# EAGLE board homeboard3 (EAGLE 6.0)
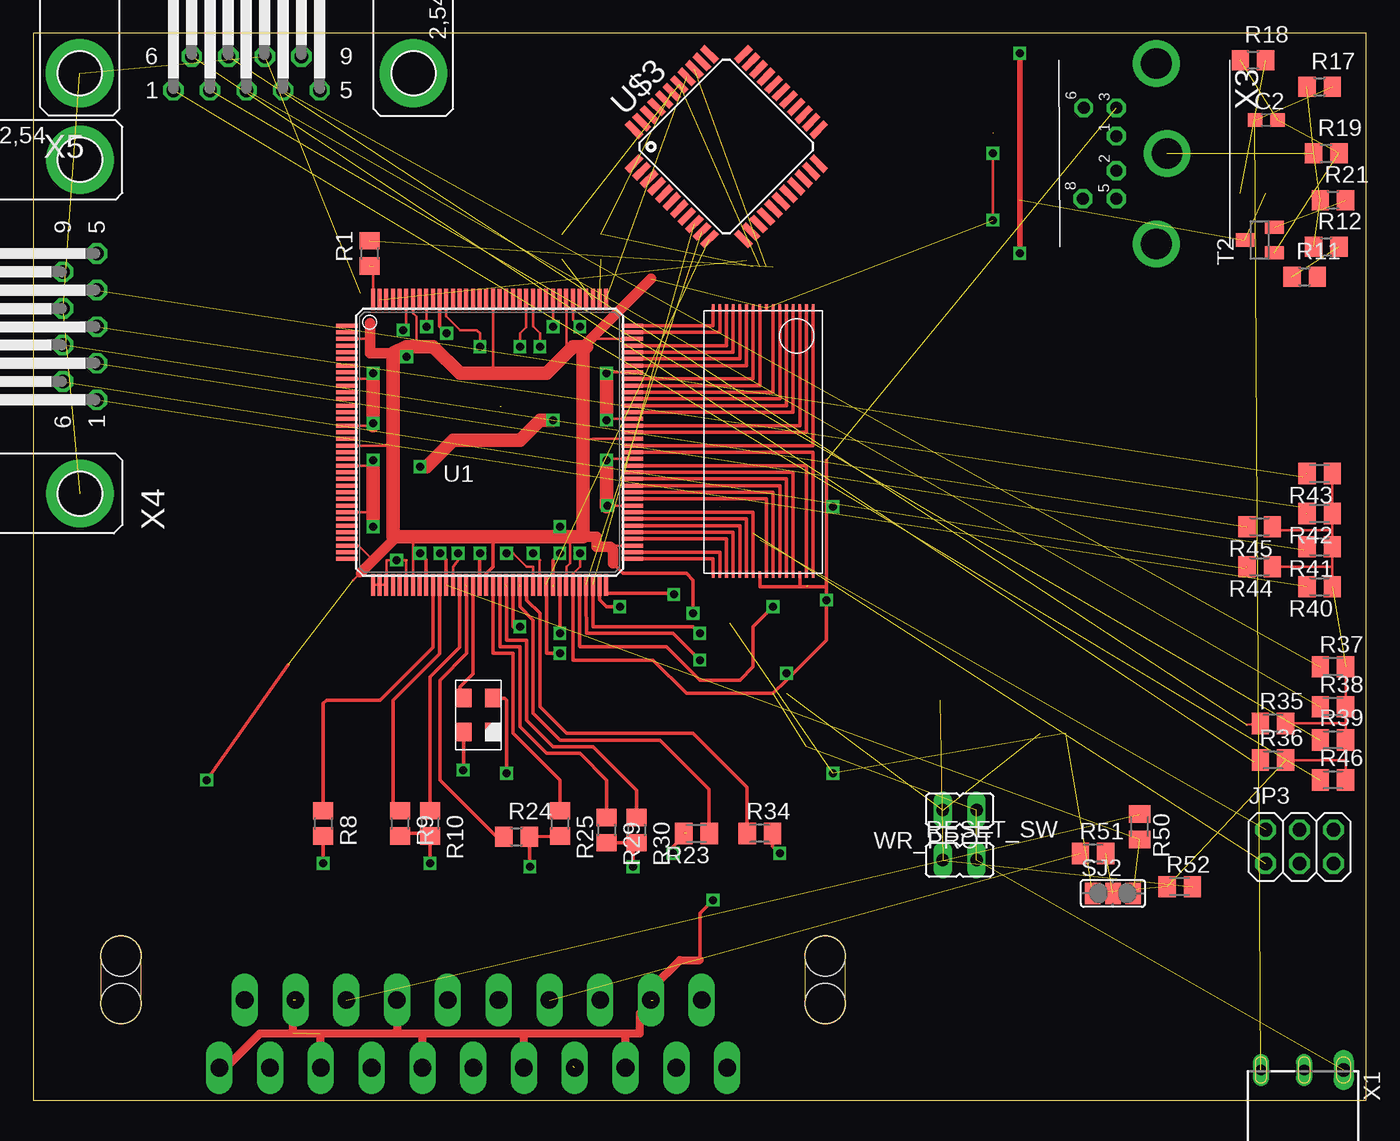
[diagram p0: board, top side]
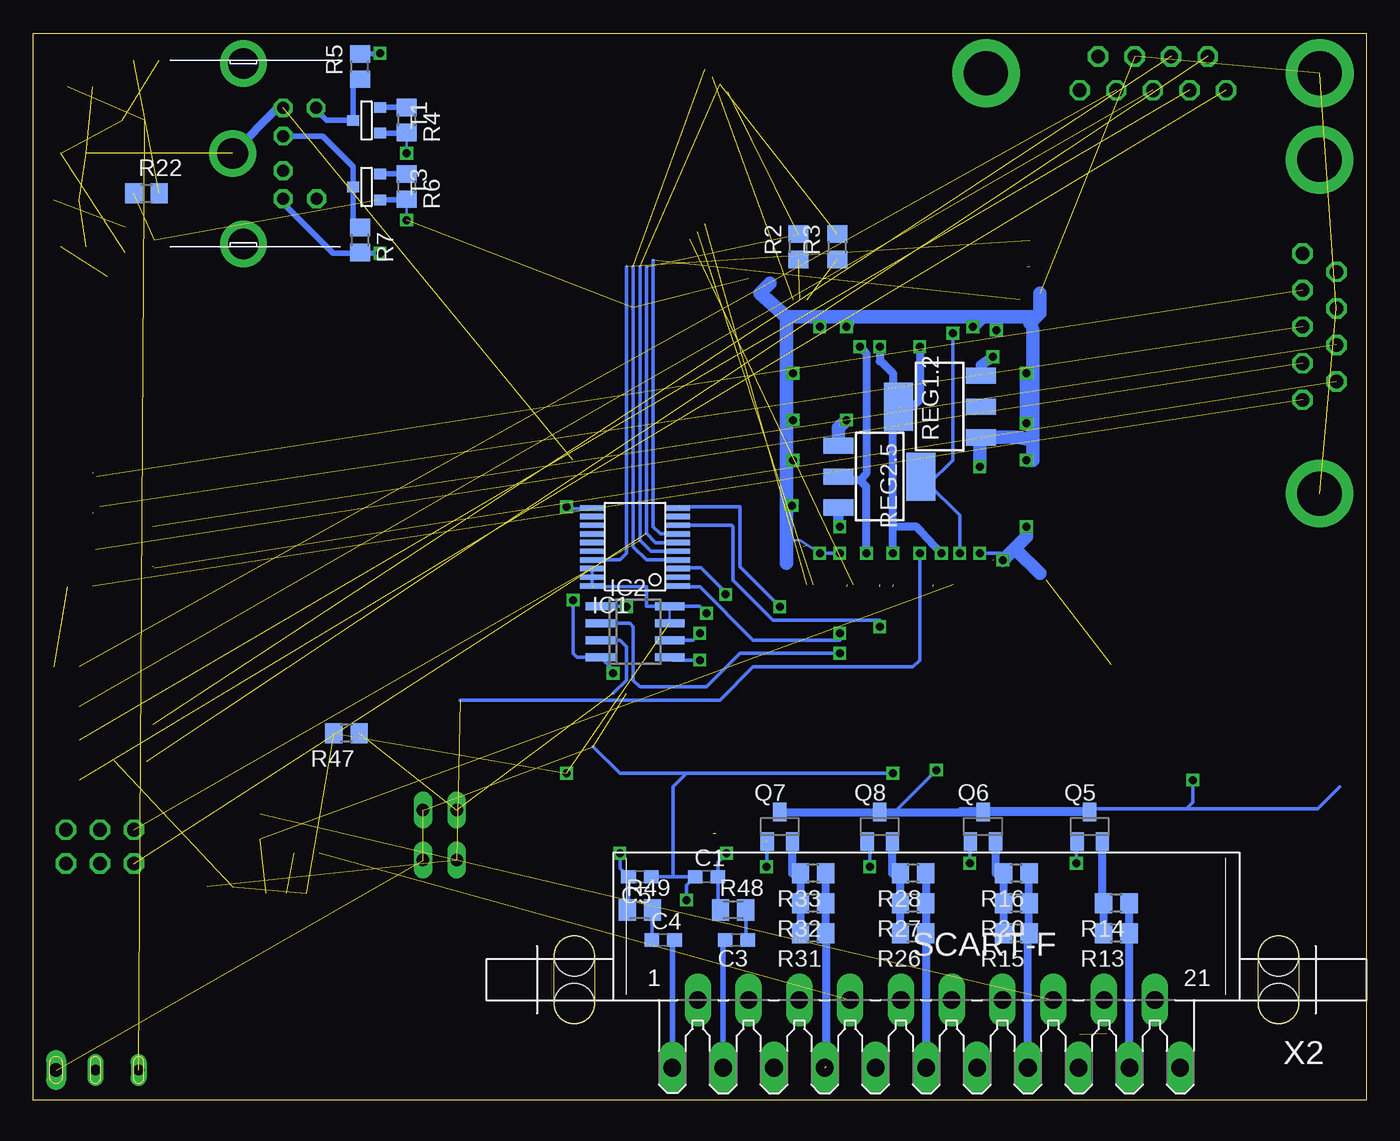
[diagram p1: board, bottom side, seen from below]

Size 100 x 80 mm. Coordinates in mm from the lower left corner, seen from the top.
Outline: 0,0 100,0 100,80 0,80 0,0
Copper layers (1*16): Top 0.0356mm / dielectric 1.5011mm / Bottom 0.0356mm
Design rules: minimum track width 6mil, minimum drill 13mil, track to track 6mil, track to pad 6mil, pad to pad 6mil, via to via 6mil, smd to smd 6mil, copper to edge 15mil, drill to drill 6mil, minimum pad ring 7mil, minimum via ring 7mil, stop-mask expansion 4mil, vias tented up to drill 0mil, thermal gap 10mil
Net classes: 1 power: width 0.6 mm, drill 1.1 mm, clearance 0.4 mm

## Footprints (pad centres in the part's own frame; a part is rotated, then mirrored left to right if it is on the bottom)
C0603 = smd 1.1 x 1: 1 -0.85,0; 2 0.85,0
VO20 = smd 0.4 x 1.8: 1 5.85,6.15; 2 5.2,6.15; 3 4.55,6.15; 4 3.9,6.15; 5 3.25,6.15; 6 2.6,6.15; 7 1.95,6.15; 8 1.3,6.15; 9 0.65,6.15; 10 0,6.15; 11 0,-0.3; 12 0.65,-0.3; 13 1.3,-0.3; 14 1.95,-0.3; 15 2.6,-0.3; 16 3.25,-0.3; 17 3.9,-0.3; 18 4.55,-0.3; 19 5.2,-0.3; 20 5.85,-0.3
SO-08 = smd 0.6 x 2.2: 1 -1.905,-2.6; 2 -0.635,-2.6; 3 0.635,-2.6; 4 1.905,-2.6; 5 1.905,2.6; 6 0.635,2.6; 7 -0.635,2.6; 8 -1.905,2.6
2X03 = drill 1.016 octagon: 1 -2.54,-1.27; 2 -2.54,1.27; 3 0,-1.27; 4 0,1.27; 5 2.54,-1.27; 6 2.54,1.27
SOT23 = smd 1 x 1.4: 1 -0.95,-1.1; 2 0.95,-1.1; 3 0,1.1
R0805 = smd 1.3 x 1.5: 1 -0.95,0; 2 0.95,0
M0805 = smd 1.3 x 1.6: 1 -0.95,0; 2 0.95,0
SOT223 = smd 1.219 x 2.235: 1 -2.311,-3.099; 2 0,-3.099; 3 2.311,-3.099 | smd 3.6 x 2.2: 4 0,3.099
JP1 = drill 0.914 long: 1 0,-1.27; 2 0,1.27
SJ_2 = smd 1.168 x 1.6: 1 -1.524,0; 2 0,0; 3 1.524,0
SOT-23 = smd 0.787 x 0.889: 1 0.025,-1.016; 2 -0.94,1.016; 3 0.991,1.016
TQ144 = smd 1.6 x 0.3: P1 -10.7,8.75; P2 -10.7,8.25; P3 -10.7,7.75; P4 -10.7,7.25; P5 -10.7,6.75; P6 -10.7,6.25; P7 -10.7,5.75; P8 -10.7,5.25; P9 -10.7,4.75; P10 -10.7,4.25; P11 -10.7,3.75; P12 -10.7,3.25; P13 -10.7,2.75; P14 -10.7,2.25; P15 -10.7,1.75; P16 -10.7,1.25; P17 -10.7,0.75; P18 -10.7,0.25; P19 -10.7,-0.25; P20 -10.7,-0.75; P21 -10.7,-1.25; P22 -10.7,-1.75; P23 -10.7,-2.25; P24 -10.7,-2.75; P25 -10.7,-3.25; P26 -10.7,-3.75; P27 -10.7,-4.25; P28 -10.7,-4.75; P29 -10.7,-5.25; P30 -10.7,-5.75; P31 -10.7,-6.25; P32 -10.7,-6.75; P33 -10.7,-7.25; P34 -10.7,-7.75; P35 -10.7,-8.25; P36 -10.7,-8.75; P73 10.7,-8.75; P74 10.7,-8.25; P75 10.7,-7.75; P76 10.7,-7.25; P77 10.7,-6.75; P78 10.7,-6.25; P79 10.7,-5.75; P80 10.7,-5.25; P81 10.7,-4.75; P82 10.7,-4.25; P83 10.7,-3.75; P84 10.7,-3.25; P85 10.7,-2.75; P86 10.7,-2.25; P87 10.7,-1.75; P88 10.7,-1.25; P89 10.7,-0.75; P90 10.7,-0.25; P91 10.7,0.25; P92 10.7,0.75; P93 10.7,1.25; P94 10.7,1.75; P95 10.7,2.25; P96 10.7,2.75; P97 10.7,3.25; P98 10.7,3.75; P99 10.7,4.25; P100 10.7,4.75; P101 10.7,5.25; P102 10.7,5.75; P103 10.7,6.25; P104 10.7,6.75; P105 10.7,7.25; P106 10.7,7.75; P107 10.7,8.25; P108 10.7,8.75 | smd 0.3 x 1.6: P37 -8.75,-10.7; P38 -8.25,-10.7; P39 -7.75,-10.7; P40 -7.25,-10.7; P41 -6.75,-10.7; P42 -6.25,-10.7; P43 -5.75,-10.7; P44 -5.25,-10.7; P45 -4.75,-10.7; P46 -4.25,-10.7; P47 -3.75,-10.7; P48 -3.25,-10.7; P49 -2.75,-10.7; P50 -2.25,-10.7; P51 -1.75,-10.7; P52 -1.25,-10.7; P53 -0.75,-10.7; P54 -0.25,-10.7; P55 0.25,-10.7; P56 0.75,-10.7; P57 1.25,-10.7; P58 1.75,-10.7; P59 2.25,-10.7; P60 2.75,-10.7; P61 3.25,-10.7; P62 3.75,-10.7; P63 4.25,-10.7; P64 4.75,-10.7; P65 5.25,-10.7; P66 5.75,-10.7; P67 6.25,-10.7; P68 6.75,-10.7; P69 7.25,-10.7; P70 7.75,-10.7; P71 8.25,-10.7; P72 8.75,-10.7; P109 8.75,10.7; P110 8.25,10.7; P111 7.75,10.7; P112 7.25,10.7; P113 6.75,10.7; P114 6.25,10.7; P115 5.75,10.7; P116 5.25,10.7; P117 4.75,10.7; P118 4.25,10.7; P119 3.75,10.7; P120 3.25,10.7; P121 2.75,10.7; P122 2.25,10.7; P123 1.75,10.7; P124 1.25,10.7; P125 0.75,10.7; P126 0.25,10.7; P127 -0.25,10.7; P128 -0.75,10.7; P129 -1.25,10.7; P130 -1.75,10.7; P131 -2.25,10.7; P132 -2.75,10.7; P133 -3.25,10.7; P134 -3.75,10.7; P135 -4.25,10.7; P136 -4.75,10.7; P137 -5.25,10.7; P138 -5.75,10.7; P139 -6.25,10.7; P140 -6.75,10.7; P141 -7.25,10.7; P142 -7.75,10.7; P143 -8.25,10.7; P144 -8.75,10.7
TSOP32 = smd 0.5 x 0.2: P1 -9.75,3.75; P2 -9.75,3.25; P3 -9.75,2.75; P4 -9.75,2.25; P5 -9.75,1.75; P6 -9.75,1.25; P7 -9.75,0.75; P8 -9.75,0.25; P9 -9.75,-0.25; P10 -9.75,-0.75; P11 -9.75,-1.25; P12 -9.75,-1.75; P13 -9.75,-2.25; P14 -9.75,-2.75; P15 -9.75,-3.25; P16 -9.75,-3.75; P17 10.25,-3.75; P18 10.25,-3.25; P19 10.25,-2.75; P20 10.25,-2.25; P21 10.25,-1.75; P22 10.25,-1.25; P23 10.25,-0.75; P24 10.25,-0.25; P25 10.25,0.25; P26 10.25,0.75; P27 10.25,1.25; P28 10.25,1.75; P29 10.25,2.25; P30 10.25,2.75; P31 10.25,3.25; P32 10.25,3.75
OSC_7C = smd 1.4 x 1.2: ENA -1.27,-1.1; GND 1.27,-1.1; OUT 1.27,1.1; VDD -1.27,1.1
TQFP44 = smd 1.5 x 0.5: 1 -5.8,4; 2 -5.8,3.2; 3 -5.8,2.4; 4 -5.8,1.6; 5 -5.8,0.8; 6 -5.8,0; 7 -5.8,-0.8; 8 -5.8,-1.6; 9 -5.8,-2.4; 10 -5.8,-3.2; 11 -5.8,-4; 23 5.8,-4; 24 5.8,-3.2; 25 5.8,-2.4; 26 5.8,-1.6; 27 5.8,-0.8; 28 5.8,0; 29 5.8,0.8; 30 5.8,1.6; 31 5.8,2.4; 32 5.8,3.2; 33 5.8,4 | smd 0.5 x 1.5: 12 -4,-5.8; 13 -3.2,-5.8; 14 -2.4,-5.8; 15 -1.6,-5.8; 16 -0.8,-5.8; 17 0,-5.8; 18 0.8,-5.8; 19 1.6,-5.8; 20 2.4,-5.8; 21 3.2,-5.8; 22 4,-5.8; 34 4,5.8; 35 3.2,5.8; 36 2.4,5.8; 37 1.6,5.8; 38 0.8,5.8; 39 0,5.8; 40 -0.8,5.8; 41 -1.6,5.8; 42 -2.4,5.8; 43 -3.2,5.8; 44 -4,5.8
1503_04 = drill 0.8 pad 1.2 long: 1 3.9,-10.25; 2 0.65,-10.25 | drill 1 pad 1.2 long: 3 -2.3,-10.25 | hole 1.6: 0,0
SCART-F = drill 1.321 long: 1 19.05,5.08; 2 17.145,0; 3 15.24,5.08; 4 13.335,0; 5 11.43,5.08; 6 9.525,0; 7 7.62,5.08; 8 5.715,0; 9 3.81,5.08; 10 1.905,0; 11 0,5.08; 12 -1.905,0; 13 -3.81,5.08; 14 -5.715,0; 15 -7.62,5.08; 16 -9.525,0; 17 -11.43,5.08; 18 -13.335,0; 19 -15.24,5.08; 20 -17.145,0; 21 -19.05,5.08 | hole 3.023: 26.416,0.254; 26.416,-3.302; -26.416,0.254; -26.416,-3.302
M_DIN6 = drill 0.9 pad 1.422 octagon: 1 -1.3,-3.75; 2 1.3,-3.75; 3 -3.4,-3.75; 5 3.4,-3.75; 6 -3.4,-6.2; 8 3.4,-6.25 | drill 2.3 pad 3.5: SH1 6.8,-0.75; SH2 0,0.05; SH3 -6.75,-0.75
F09HP = drill 1.016 octagon: 1 -5.486,-1.27; 2 -2.743,-1.27; 3 0,-1.27; 4 2.743,-1.27; 5 5.486,-1.27; 6 -4.115,1.27; 7 -1.372,1.27; 8 1.372,1.27; 9 4.115,1.27 | drill 3.302 pad 5.08: G1 -12.522,0; G2 12.522,0

## Placement (x,y rotation side)
C1  [C0603]  49.5,16.75 0 bottom
C2  100nF  [C0603]  92.5,73.5 0 top
C3  [C0603]  47.25,12 180 bottom
C4  [C0603]  52.75,12 0 bottom
C5  [C0603]  54.5,16.75 180 bottom
IC1  XCF02S  [VO20]  57.76,44.41 270 bottom
IC2  25LC080SN  [SO-08]  54.85,35.11 270 bottom
JP3  [2X03]  95,19 0 top
Q5  BC848SMD  [SOT23]  20.75,20.5 0 bottom
Q6  BC848SMD  [SOT23]  28.75,20.5 0 bottom
Q7  BC848SMD  [SOT23]  44,20.5 0 bottom
Q8  BC848SMD  [SOT23]  36.5,20.5 0 bottom
R1  100  [R0805]  25.25,63.49 90 top
R2  100  [R0805]  42.58,64 90 bottom
R3  100  [R0805]  39.68,63.99 90 bottom
R4  1000  [R0805]  72,73.5 270 bottom
R5  1000  [R0805]  75.5,77.5 90 bottom
R6  1000  [R0805]  72,68.5 270 bottom
R7  1000  [R0805]  75.5,64.5 270 bottom
R8  2200  [R0805]  21.75,20.75 270 top
R9  2200  [R0805]  27.5,20.75 270 top
R10  1000  [R0805]  29.75,20.75 270 top
R11  75  [R0805]  95.38,61.75 0 top
R12  750  [R0805]  97,64 0 top
R13  680  [R0805]  18.75,12.5 180 bottom
R14  2200  [R0805]  18.75,14.75 180 bottom
R15  270  [R0805]  26.25,12.5 180 bottom
R16  680  [R0805]  26.25,17 180 bottom
R17  10000  [R0805]  96.5,76 0 top
R18  4700  [R0805]  91.5,78 0 top
R19  10000  [R0805]  97,71 0 top
R20  4700  [R0805]  26.25,14.75 180 bottom
R21  47000  [R0805]  97.5,67.5 0 top
R22  1000  [R0805]  91.5,68 0 bottom
R23  [M0805]  49.75,20 180 top
R24  2200  [R0805]  36.25,19.75 0 top
R25  1000  [R0805]  39.5,20.75 270 top
R26  270  [R0805]  34,12.5 180 bottom
R27  680  [R0805]  34,14.75 180 bottom
R28  4700  [R0805]  34,17 180 bottom
R29  2200  [R0805]  43,20.25 270 top
R30  1000  [R0805]  45.25,20.25 270 top
R31  270  [R0805]  41.5,12.5 180 bottom
R32  680  [R0805]  41.5,14.75 180 bottom
R33  4700  [R0805]  41.5,17 180 bottom
R34  [M0805]  54.5,20 0 top
R35  [M0805]  93,28.25 0 top
R36  [M0805]  93,25.5 0 top
R37  [M0805]  97.5,32.5 0 top
R38  [M0805]  97.5,29.5 0 top
R39  [M0805]  97.5,27 0 top
R40  [M0805]  96.5,38.5 180 top
R41  [M0805]  96.5,41.5 180 top
R42  [M0805]  96.5,44 180 top
R43  [M0805]  96.5,47 180 top
R44  [M0805]  92,40 180 top
R45  [M0805]  92,43 180 top
R46  [M0805]  97.5,24 0 top
R47  4K7  [R0805]  76.5,27.5 180 bottom
R48  [M0805]  47.5,14.25 0 bottom
R49  [M0805]  54.5,14.25 0 bottom
R50  2k2  [M0805]  83,20.5 270 top
R51  2k2  [M0805]  79.5,18.5 0 top
R52  4K7  [M0805]  86,16 0 top
REG1.2  1.2V  [SOT223]  32,52 90 bottom
REG2.5  2.5V  [SOT223]  36.5,46.75 270 bottom
RESET_SW  [JP1]  69.5,18 270 top
SJ2  [SJ_2]  81,15.5 0 top
T1  BSS138  [SOT-23]  75,73.5 270 bottom
T2  BC848  [SOT23]  92,64.5 90 top
T3  BSS138  [SOT-23]  75,68.5 270 bottom
U1  XC3S400TQ144  [TQ144]  34.23,49.33 0 top
U$1  AS6C4008  [TSOP32]  54.75,49.67 270 top
U$2  TXO_7C  [OSC_7C]  33.38,28.88 90 top
U$3  ATMEGA32U4-AU  [TQFP44]  52,71.5 45 top
WR_PROT  [JP1]  69.5,21.75 90 top
X1  1503_04  [1503_04]  96,-8 180 top
X2  SCART-F  [SCART-F]  33,7.5 180 bottom
X3  [M_DIN6]  85,71 270 top
X4  [F09HP]  3.5,58 90 top
X5  [F09HP]  16,77 0 top

## Library data of the parts
C1-C5 R23 R34-R46 R48-R52 = resistor
IC1 = smd-special
IC2 = microchip; MF: MICROCHIP; MPN: 25LC080/SN; OC_FARNELL: 1137302; OC_NEWARK: 96K4092
JP3 = pinhead
Q5-Q8 = bc548
R1-R22 R24-R33 R47 = rcl
REG1.2 REG2.5 U$1 U$2 = cpcfpga
RESET_SW SJ2 WR_PROT = jumper
T1 T3 = zetex; OC_FARNELL: unknown; OC_NEWARK: unknown
T2 = transistor
U1 = xilinx_spartan3_virtex4_and_5
U$3 = adafruit
X1 = con-lumberg; OC_FARNELL: 1216981; OC_NEWARK: unknown
X2 = con-hirschmann; OC_FARNELL: unknown; OC_NEWARK: unknown
X3 = mini_din
X4 X5 = con-subd; OC_FARNELL: unknown; OC_NEWARK: unknown

## Nets
AINLEFT: X2.6
AINRIGHT: X2.2
B0: R30.1 U1.P57
B1: R29.1 U1.P56
CASIN: R21.2 T2.2
CLK16: U1.P52 U$2.OUT
CLK_5V: R5.1 T1.1 X3.6
COMPIN: X2.20
CSYNC: R8.1 U1.P46
D_FASTBLANKING: R11.1 R12.2
DATA_5V: R7.1 T3.1 X3.1
FPGA_AUDIO_LEFT: R23.1 U1.P59
FPGA_AUDIO_RIGHT: R34.1 U1.P60
G0: R25.1 U1.P55
G1: R24.1 U1.P51
GND: C1.1 C5.1 IC1.11 IC2.4 R12.1 R17.1 R19.1 R21.1 REG1.2.1 REG2.5.1 RESET_SW.2 U1.P9 U1.P16 U1.P22 U1.P29 U1.P37 U1.P38 U1.P39 U1.P42 U1.P45 U1.P64 U1.P67 U1.P81 U1.P88 U1.P94 U1.P101 U1.P114 U1.P117 U1.P136 U1.P139 U$1.P24 U$1.P30 U$2.GND WR_PROT.1 X1.3 X2.4 X2.5 X2.9 X2.13 X2.14 X2.17 X2.18 X2.21 X3.3 X3.SH2 X4.8 X4.G1 X5.8 X5.G1
MISO: IC2.2 U1.P63 U$3.11
MOSI: IC2.5 U1.P69 U$3.10
N$1: U1.P108 U$1.P16
N$2: U1.P107 U$1.P15
N$3: U1.P105 U$1.P14
N$4: U1.P104 U$1.P13
N$5: U1.P103 U$1.P12
N$6: U1.P102 U$1.P11
N$7: U1.P100 U$1.P10
N$8: U1.P99 U$1.P9
N$9: U1.P98 U$1.P7
N$10: U1.P97 U$1.P6
N$11: U1.P96 U$1.P5
N$12: U1.P95 U$1.P4
N$13: U1.P93 U$1.P3
N$14: U1.P92 U$1.P2
N$15: U1.P90 U$1.P1
N$16: U1.P73 U$1.P17
N$17: U1.P74 U$1.P18
N$18: U1.P76 U$1.P19
N$19: U1.P77 U$1.P20
N$20: U1.P78 U$1.P21
N$21: U1.P79 U$1.P22
N$22: U1.P80 U$1.P23
N$23: U1.P82 U$1.P25
N$24: U1.P83 U$1.P26
N$25: U1.P84 U$1.P27
N$26: U1.P85 U$1.P28
N$27: U1.P86 U$1.P29
N$28: U1.P87 U$1.P31
N$29: U1.P89 U$1.P32
N$30: R35.1 X5.7
N$31: R36.1 X5.6
N$32: R37.1 X5.4
N$33: R38.1 X5.3
N$34: R39.1 X5.2
N$35: IC1.3 U1.P72
N$36: IC1.17 R1.2
N$37: R46.1 X5.1
N$38: IC1.10 U1.P71
N$39: R2.1 U1.P110
N$40: IC1.7 U1.P143
N$41: R40.2 X4.1
N$42: R1.1 U1.P144
N$43: R3.1 U1.P111
N$44: R41.2 X4.2
N$45: R42.2 X4.3
N$46: R43.2 X4.4
N$47: R44.2 X4.6
N$48: R45.2 X4.7
N$49: IC2.3 R47.1 WR_PROT.2
N$51: C1.2 R23.2 R48.1
N$52: C3.1 R48.2
N$53: Q6.1 R9.2 R10.2
N$54: Q6.2 R15.2 R16.2 R20.2
N$55: Q8.1 R24.2 R25.2
N$56: Q8.2 R26.2 R27.2 R28.2
N$57: Q7.1 R29.2 R30.2
N$58: Q7.2 R31.2 R32.2 R33.2
N$59: Q5.2 R13.2 R14.2
N$60: C2.2 R18.1 R19.2 T2.1
N$61: C2.1 R17.2 X1.1
N$62: R18.2 R22.2
N$63: Q5.1 R8.2
N$64: C4.1 R49.2
N$65: C5.2 R34.2 R49.1
N$66: R51.2 SJ2.2
N$67: U1.P26
N$68: JP3.3
N$69: JP3.5
N$70: JP3.6
N$72: JP3.4
N$73: U1.P12
PE1: X3.SH1
PE3: X3.SH3
PROM_DO: IC1.1 U1.P65
PROM_INITB: IC1.8 U1.P58
PS2CLK: R4.1 T1.2
PS2DAT: R6.1 T3.2
R0: R10.1 U1.P50
R1: R9.1 U1.P47
RESET: R52.2 RESET_SW.1 U1.P53
SCART_BLANKING: R50.1 X2.16
SCART_BLUE: R31.1 R32.1 R33.1 X2.7
SCART_COMP: R13.1 R14.1 X2.19
SCART_GREEN: R26.1 R27.1 R28.1 X2.11
SCART_LEFT: C3.2 X2.3
SCART_MODE: R51.1 X2.8
SCART_RED: R15.1 R16.1 R20.1 X2.15
SCART_RIGHT: C4.2 X2.1
SCLK: IC2.6 U1.P70 U$3.9
SPI_SEL0: IC2.1 U1.P68
SPI_SEL1: U$3.8
TCK: IC1.6 JP3.1 R2.2 U$3.39
TDI: IC1.4 U$3.36
TDO: U1.P109 U$3.37
TMS: IC1.5 JP3.2 R3.2 U$3.38
VCC: IC1.18 IC1.19 IC1.20 IC2.7 IC2.8 Q5.3 Q6.3 Q7.3 Q8.3 R4.2 R6.2 R22.1 R35.2 R36.2 R37.2 R38.2 R39.2 R40.1 R41.1 R42.1 R43.1 R44.1 R45.1 R46.2 R47.2 R52.1 REG1.2.3 REG2.5.3 SJ2.1 T1.3 T2.3 T3.3 U1.P3 U1.P19 U1.P34 U1.P43 U1.P54 U1.P66 U1.P75 U1.P91 U1.P106 U1.P115 U1.P126 U1.P138 U$1.P8 U$2.VDD
VCC_5V: R5.2 R7.2 X3.5
VCC_B3: R11.2
VCCAUX: R50.2 REG2.5.4 SJ2.3 U1.P48 U1.P134
VCCAUX_R: REG2.5.2 U1.P62 U1.P120
VCCINT: REG1.2.4 U1.P49 U1.P61 U1.P121 U1.P133
XG1: U1.P44
XR0: U1.P41
XR1: U1.P40
XXCSYNC: U1.P137
XXR0: U1.P140
XXR1: U1.P141

## Tracks (layer width: path | path; a pad name or v marks a point on that pad's centre or on a via)
B0  (1 unrouted)
  Top 0.254: R30.1 45.25,23.25 42,26.5 39,26.5 37,28.5 37,34.5 35.5,34.5 35.5,38.5
B1
  Top 0.254: R29.1 43,24 41,26 38.5,26 36.5,28 36.5,34 35,34 35,38.6 U1.P56
CASIN  (1 unrouted)
CLK16
  Top 0.254: U1.P52 32.98,31.98 32,31 32,30.42 U$2.OUT
CLK_5V
  Bottom 0.3: 76.02,76.03 R5.1
  Bottom 0.4: X3.6 78.8,74.3 78,73.5 76.04,73.5 T1.1 76.02,76.03
CSYNC
  Top 0.254: R8.1 21.75,29.75 22,30 26,30 29.98,33.98 U1.P46
D_FASTBLANKING  (1 unrouted)
DATA_5V
  Bottom 0.4: R7.1 76.02,65.97 T3.1 76,68.49 76,70 78.3,72.3 X3.1
FPGA_AUDIO_LEFT  (1 unrouted)
  Top 0.254: R23.1 50.7,23.3 47,27 39.5,27 37.5,29 37.5,36 36.5,37 36.5,38.5
FPGA_AUDIO_RIGHT
  Top 0.254: R34.1 53.55,23.45 49.5,27.5 40,27.5 38,29.5 38,36.5 37,37.5 37,38.6 U1.P60
G0
  Top 0.254: U1.P55 34.48,36.98 34.5,33.5 36,33.5 36,27.5 39.5,24 R25.1 39.5,21.5
G1  (1 unrouted)
  Top 0.254: R24.1 34.75,19.75 30.5,24 30.5,31.5 32.5,33.5 32.5,38.5
GND  (via drill 0.6)  (18 unrouted)
  Top 0.2: U1.P9 25.5,54.08 25.5,54 | U1.P16 25.5,50.58 25.5,50.5 | U1.P22 25.5,47.58 25.5,47.5 | U1.P29 25.5,44.08 | U1.P37 U1.P38 U1.P39 26.5,38.66 26.5,40.5 v27.25,40.5 28,40.5 | U1.P42 27.98,40.48 | U1.P136 29.5,60.01 v29.5,58 | U1.P139 27.98,57.98 v27.75,57.75 | U1.P101 43.08,54.58 v43,54.5 | U1.P88 43.08,48.08 v43,48 | U1.P81 v43.08,44.58 43,44.5 | U1.P94 43.08,51.08 v43,51 | U1.P117 38.98,58.02 v39,58 | U1.P114 40.48,58.52 v41,58 | U1.P67 40.48,39.48 41,40 v41,41
  Top 0.254: 39,38.5 39,40.5 v39.5,41 | U$1.P24 54.5,38.5 57.5,38.5 | 57.5,38.5 59.5,38.5 | 59.5,38.5 59.5,44.5 | 59.5,44.5 59.5,48 | U$1.P30 57.5,38.5 | 59.5,38.5 v59.5,37.5 59.5,34.5 56.5,31.5 | v60,44.5 59.5,44.5 | 50,10.5 50,14 v51,15 | U1.P67 40.48,37.02 40.5,37 40.5,33 46.5,33 49,30.5 55.5,30.5 56.5,31.5 | v56.5,32 56.5,31.5 | U$2.GND 35.35,30.14 35.5,30 v35.5,24.5 | U1.P45 29.48,40.52 v29,41
  Top 0.4: X2.21 14.42,2.42 | 27.29,5.21 27.5,5
  Top 0.406: 29.19,4.81 29,5 | 36.81,4.81 37,5 | 21.57,4.93 21.5,4.93 21.57,4.86 | 44.43,4.93 44.5,5
  Top 0.6: 14.42,2.42 17,5 19.5,5 | 19.5,5 27.5,5 29,5 37,5 44.5,5 45.5,5 45.5,6.5 46.5,7.5 46.5,8.5 48.5,10.5 50,10.5 | X2.13 29.19,4.81 | X2.9 36.81,4.81 | X2.17 21.57,4.86 | X2.5 44.43,4.93 | 25.5,54.08 v25.5,54.5 | X2.14 27.29,5.21 | 19.5,5 19.5,7.5
  Top 0.8: 25.5,50.5 v25.5,50.75 | v25.5,48 25.5,47.5
  Top 1: 25.5,47.5 25.5,44.08 v25.5,43 | 25.5,50.58 25.5,54 | v39,51 38,51 36.5,49.5 31.5,49.5 29.5,47.5 v29,47.5 | v43,54.5 v43,51 | v43,48 43,44.5
  Bottom 0.2: v43,54.5 43.5,53.75 | v43,48 43.5,47.75 | v43,51 43.5,50.75 | v43.08,44.58 43.42,44.58 43.5,44.25 | v41,41 42.5,42 43.5,42 | 27.75,58.25 28,58.75
  Bottom 0.254: v39.5,41 v41,41 | IC1.11 58.14,44.33 59.83,44.33 v60,44.5 | v59.5,37.5 59.5,33.5 59.21,33.21 IC2.4 56.5,32.25 v56.5,32 | v51,15 51,16.1 C1.1 52,16.75 | 52,16.75 C5.1 | v35.5,24.5 51,24.5 | 51,24.5 52,23.5 52,16.75 | 51,24.5 56,24.5 58,26.5 | v29,41 26.75,41 26.38,41.38
  Bottom 0.6: X3.3 81.65,74.4 X3.SH2 | 26.25,41.25 26.5,41.25
  Bottom 0.8: 29,49.59 REG1.2.1 | 25,58.75 25,57.75 25.25,58.25
  Bottom 1: v25.5,50.75 25,55 | 25,54.5 25,50.75 | v25.5,50.75 25,50.75 | 25,50.75 25,49.5 | 25,49.5 25,48 v25.5,48 | v27.25,40.5 26.5,41.25 26.38,41.38 25.5,42.25 v25.5,43 | 25,54.5 v25.5,54.5 v25.5,50.75 | 25,54.5 25,55 | 25,55 25,57.75 | 25,58.75 28,58.75 28.75,58.75 | 24.5,39.5 26.25,41.25 | REG1.2.1 26.19,49.69 25,49.5 | REG2.5.1 39.6,50.4 v39,51 | v29,47.5 29,49.59 | 38.75,58.75 28.75,58.75 | 28.75,58.75 v29.5,58 | 41,58.75 43.5,58.75 | 43.5,58.75 43.5,53.75 43.5,50.75 43.5,47.75 43.5,44.25 43.5,42 43.5,40.25 | v39,58 38.75,58.75 | 38.75,58.75 41,58.75 | 41,58.75 v41,58 | 43.5,58.75 45.5,60.5 44.75,61.25 | v27.75,57.75 27.75,58.25 | 24.5,60.5 24.5,59 25.25,58.25
MISO  (via drill 0.6)  (1 unrouted)
  Top 0.254: v39.5,33.5 38.5,33.5 38.5,38.6 U1.P63
  Bottom 0.254: v39.5,33.5 47,33.5 49.5,31 54.5,31 55,31.5 55,35.5 55.25,35.75 IC2.2
MOSI  (via drill 0.6)  (1 unrouted)
  Top 0.254: U1.P69 41.48,37.48 41.5,35 48,35 v50,33
  Bottom 0.254: v50,33 52.05,33 IC2.5
N$1
  Top 0.254: U1.P108 51,58.08 U$1.P16
N$2
  Top 0.254: U1.P107 51.5,57.58 U$1.P15
N$3
  Top 0.254: U1.P105 52,56.58 U$1.P14
N$4
  Top 0.254: U1.P104 52.5,56.08 U$1.P13
N$5
  Top 0.254: U1.P103 53,55.58 U$1.P12
N$6
  Top 0.254: U1.P102 53.5,55.08 U$1.P11
N$7
  Top 0.254: U1.P100 54,54.08 U$1.P10
N$8
  Top 0.254: U1.P99 54.5,53.58 U$1.P9
N$9
  Top 0.254: U1.P98 55.5,53.08 U$1.P7
N$10
  Top 0.254: U1.P97 56,52.58 U$1.P6
N$11
  Top 0.254: U1.P96 56.5,52.08 U$1.P5
N$12
  Top 0.254: U1.P95 57,51.58 U$1.P4
N$13
  Top 0.254: U1.P93 57.5,50.58 U$1.P3
N$14
  Top 0.254: U1.P92 58,50.08 U$1.P2
N$15
  Top 0.254: U1.P90 58.5,49.08 U$1.P1
N$16
  Top 0.254: U1.P73 51,40.58 U$1.P17
N$17
  Top 0.254: U1.P74 51.5,41.08 U$1.P18
N$18
  Top 0.254: U1.P76 52,42.08 U$1.P19
N$19
  Top 0.254: U1.P77 52.5,42.58 U$1.P20
N$20
  Top 0.254: U1.P78 53,43.08 U$1.P21
N$21
  Top 0.254: U1.P79 53.5,43.58 U$1.P22
N$22
  Top 0.254: U1.P80 54,44.08 U$1.P23
N$23
  Top 0.254: U1.P82 55,45.08 U$1.P25
N$24
  Top 0.254: U1.P83 55.5,45.58 U$1.P26
N$25
  Top 0.254: U1.P84 56,46.08 U$1.P27
N$26
  Top 0.254: U1.P85 56.5,46.58 U$1.P28
N$27
  Top 0.254: U1.P86 57,47.08 U$1.P29
N$28
  Top 0.254: U1.P87 58,47.58 U$1.P31
N$29
  Top 0.254: U1.P89 58.5,48.58 U$1.P32
N$30  (1 unrouted)
  Top 0.2: 91.05,28.13 R35.1
N$31  (1 unrouted)
  Top 0.2: 91.55,25.39 R36.1
N$32  (1 unrouted)
N$33  (1 unrouted)
N$34  (1 unrouted)
  Top 0.2: 96.55,26.88 R39.1
N$35  (via drill 0.6)
  Top 0.2: 43,38.66 U1.P72
  Top 0.254: 43,38.66 43,38 48,38 48.05,37.95 v48.05,37.91
  Bottom 0.254: IC1.3 51.55,39.91 49.91,39.91 48,38 48,37.96 v48.05,37.91
N$36  (1 unrouted)
  Bottom 0.254: IC1.17 55.99,40.51 55.5,41 55.5,62.5
N$37  (1 unrouted)
N$38  (via drill 0.6)  (1 unrouted)
  Top 0.254: U1.P71 42.48,37.52 43,37 v44,37
  Bottom 0.254: IC1.10 51.51,44.51 | v44,37 47,40 47,44.5 51.5,44.5
N$39  (1 unrouted)
N$40  (1 unrouted)
  Bottom 0.254: IC1.7 52.96,42.46 53.5,43 53.5,63
N$41  (1 unrouted)
  Top 0.2: 95.54,38.51 R40.2
N$42  (1 unrouted)
  Top 0.2: U1.P144 25.48,62.5 25,62.5
N$43  (1 unrouted)
N$44  (1 unrouted)
  Top 0.2: 95.31,41.26 R41.2
N$45  (2 unrouted)
  Top 0.2: 95,44.5 95.5,44
N$46  (2 unrouted)
  Top 0.2: 95.24,46.74 95.5,47
N$47  (2 unrouted)
  Top 0.2: 90.89,39.88 91,40
N$48  (1 unrouted)
N$49  (2 unrouted)
  Bottom 0.254: IC2.3 55.98,34.48 55.5,34 55.5,31.5 56.5,30.5
N$51  (via drill 0.6)  (1 unrouted)
  Top 0.254: v48,18.5 48,19 49,20
  Bottom 0.254: v48,18.5 48.65,17.85 C1.2 48.65,14.45 R48.1
N$52
  Bottom 0.254: R48.2 46.55,12.15 C3.1
N$53  (via drill 0.6)
  Top 0.254: v29.75,17.75 R10.2 29.7,19.8 29.5,20 27.7,20 R9.2
  Bottom 0.254: v29.75,17.75 29.75,19.35 Q6.1
N$54
  Bottom 0.6: R15.2 R20.2 R16.2 27.8,17 Q6.2
N$55  (via drill 0.6)
  Top 0.254: v37.25,17.5 R24.2 R25.2
  Bottom 0.254: v37.25,17.5 37.25,19.2 Q8.1
N$56
  Bottom 0.6: R26.2 R27.2 R28.2 35.55,17 Q8.2
N$57  (via drill 0.6)  (1 unrouted)
  Top 0.254: R29.2 R30.2 | v45,17.5 45,19.5
  Bottom 0.254: Q7.1 44.95,17.55 v45,17.5
N$58
  Bottom 0.6: R31.2 R32.2 R33.2 43.05,17 Q7.2
N$59
  Bottom 0.6: R13.2 R14.2 19.8,14.75 Q5.2
N$60  (3 unrouted)
N$61  (2 unrouted)
N$62  (1 unrouted)
N$63  (via drill 0.6)
  Top 0.254: R8.2 v21.75,17.75
  Bottom 0.254: v21.75,17.75 21.75,19.35 Q5.1
N$64
  Bottom 0.254: C4.1 53.6,14.2 R49.2
N$65  (via drill 0.6)
  Top 0.254: R34.2 55.45,19.05 v56,18.5
  Bottom 0.254: v56,18.5 56,17.4 C5.2 55.35,14.35 R49.1
N$66  (1 unrouted)
PROM_DO  (via drill 0.6)
  Top 0.254: v39.5,35 39.5,38.6 U1.P65
  Bottom 0.254: IC1.1 51.56,38.5 50,38.5 46,34.5 39.5,34.5 v39.5,35
PROM_INITB  (via drill 0.6)
  Top 0.254: U1.P58 36,38.6 36,35.5 v36.5,35.5
  Bottom 0.254: IC1.8 51.6,43.1 47.6,43.1 47.5,43 47.5,39 44.5,36 36.5,36 v36.5,35.5
PS2CLK
  Bottom 0.4: T1.2 R4.1
PS2DAT
  Bottom 0.4: R6.1 T3.2
R0
  Top 0.254: R10.1 29.75,31.75 31.98,33.98 U1.P50
R1
  Top 0.254: R9.1 27,21.7 27,30 30.48,33.48 U1.P47
RESET  (via drill 0.6)  (2 unrouted)
  Top 0.254: U1.P53 33.48,40.98 v33.5,41
  Bottom 0.254: v33.5,41 33.5,33 34,32.5 46,32.5 48.5,30 68,30
SCART_BLANKING  (1 unrouted)
SCART_BLUE  (1 unrouted)
  Bottom 0.6: R33.1 R32.1 R31.1 40.5,12.5 40.5,2.54
SCART_COMP
  Bottom 0.6: R14.1 R13.1 | X2.19 17.76,12.5 R13.1 | 18,12.5 R13.1
SCART_GREEN
  Bottom 0.6: R28.1 R27.1 R26.1 33,12.5 X2.11
SCART_LEFT
  Bottom 0.2: 48.24,11.66 C3.2
  Bottom 0.4: X2.3 48.24,11.66
SCART_MODE  (1 unrouted)
SCART_RED
  Bottom 0.6: R16.1 R20.1 R15.1 25.38,12.5 X2.15
SCART_RIGHT
  Bottom 0.2: 52.05,11.85 C4.2
  Bottom 0.4: X2.1 52.05,11.85
SCLK  (via drill 0.6)  (1 unrouted)
  Top 0.254: U1.P70 41.98,37.48 42,35.5 49.5,35.5 v50,35
  Bottom 0.254: v50,35 50.5,34.5 52.23,34.5 IC2.6
SPI_SEL0  (via drill 0.6)
  Top 0.254: U1.P68 40.98,34.02 41,34 47.5,34 50,31.5 53,31.5 54,32.5 54,35.5 v55.5,37
  Bottom 0.254: IC2.1 55.52,37.02 v55.5,37
TCK  (3 unrouted)
  Bottom 0.254: IC1.6 53.31,41.81 54,42.5 54,62.5
TDI  (1 unrouted)
  Bottom 0.254: IC1.4 54.01,40.51 55,41.5 55,62.5
TDO  (1 unrouted)
TMS  (3 unrouted)
  Bottom 0.254: IC1.5 53.66,41.16 54.5,42 54.5,62.5
VCC  (via drill 0.6)  (14 unrouted)
  Top 0.2: R46.2 98.45,25.5 | 98.45,25.5 R39.2 98.45,28.25 | 98.45,28.25 R38.2 R37.2 | R35.2 98.45,28.25 | R36.2 98.45,25.5 | R40.1 97.45,40 | 97.45,40 R41.1 97.45,42.62 | 97.45,42.62 R42.1 R43.1 | R44.1 97.45,40 | R45.1 93.38,43 93.62,42.75 97.33,42.75 97.45,42.62 | 28.5,38.63 U1.P43 28.48,42.25 28.48,42.48 28.5,42.5 | U1.P19 26.5,49.08 27,50.5 | v72,71 v72,66 | U1.P75 42,41.58 | U1.P106 42,57.08 41.5,56.5 | U1.P91 42,49.58 41.25,49.5 | U1.P34 24.42,41.58 25.5,40.5 | 24,39 24.5,39.5 | U1.P66 40,38.63 40,40 40.25,40.25 40.25,42.25 | U1.P126 34.48,54.52 34.5,54.5 | U1.P115 40,60.03 40,56 | 34,42 34.5,42 34.75,42 35,42.25 | 38.5,42 39,42.5 39.5,42.5 39.75,42.5 40,42.25 | U1.P3 24.92,57.08 25,57 25.25,57 | U1.P138 28.48,59.02 28.75,58.75 28.75,56.5 | 25.25,56 25.25,56.75 25.5,57
  Top 0.254: v49.5,36.5 49.5,39 49,39.5 44.25,39.5 43.5,40.25 | 19.13,32.63 v13,24 | U1.P54 33.98,39.48 34.5,40 34.5,42 | U$2.VDD 32.27,24.77 v32.25,24.75
  Top 0.6: 24.5,39.5 24.62,39.62 | 27,42.25 27,42
  Top 0.8: 28.75,56.5 28.5,56.5 | 24.62,39.62 25.5,40.5 27,42 | 27,56 25.25,56 25.25,57 25.25,58.25 | v39.5,43 39.5,42.5 | v28,55.75 28,56.5 | 43.5,40.25 43.5,41.25 43.25,41.5 42.25,41.5 42.25,42.25 41.25,42.25 | 46.34,61.59 41.25,56.5
  Top 1: 41.25,56.5 41.25,49.5 41.25,42.25 40.25,42.25 40,42.25 35,42.25 28.48,42.25 27,42.25 27,50.5 27,56 28,56.5 28.5,56.5 28.48,56.52 | 41.25,56.5 41.5,56.5 | 41.25,56.5 40.5,56.5 40,56 38.5,54.5 34.5,54.5 32,54.5 30,56.5 28.75,56.5
  Bottom 0.2: 71.55,72.55 71.55,72.95 71.5,73 | 72.01,72.51 v72.01,71.01 v72,71 | v72,66 R6.2 | IC2.7 IC2.8
  Bottom 0.254: IC1.20 IC1.19 IC1.18 | v49.5,36.5 49.98,37.02 IC2.8 54,37.02 54,38.5 58,38.5 | 30.25,21.85 13.5,21.85 | 13.5,21.85 3.65,21.85 2,23.5 | 30.5,21.85 30.25,21.85 | 30.25,21.85 30,21.6 | Q6.3 28.6,21.6 28.5,21.5 | v13,24 13,22.35 13.5,21.85 | Q8.3 35.4,21.6 v32.25,24.75
  Bottom 0.4: T1.3 72.01,72.51 72,72.5 | T3.3 72.04,67.51 R6.2 | R4.2 71.55,72.55 71.5,72.5 | 39.6,43.1 v39.5,43
  Bottom 0.6: Q5.3 28.5,21.6 28.5,21.5 | Q6.3 30,21.6 Q8.3 Q7.3
  Bottom 0.8: REG2.5.3 39.6,43.1 | REG1.2.3 28.9,55.1 v28,55.75
  other vias: 60,24.5
VCC_5V  (via drill 0.6)
  Top 0.4: v74,78.5 v74,63.5
  Bottom 0.4: X3.5 81.25,67.25 77.5,63.5 75.55,63.5 R7.2 75.5,63.5 v74,63.5 | R5.2 74.05,78.45 v74,78.5
VCCAUX  (via drill 0.6)  (2 unrouted)
  Top 0.254: U1.P48 30.98,40.52 v30.5,41 | U1.P134 30.48,58.02 v31,57.5
  Bottom 0.254: v30.5,41 30.5,43.85 32.83,46.17 | 32.83,46.17 REG2.5.4 | v31,57.5 31,48 32.83,46.17
VCCAUX_R  (via drill 0.6)
  Top 0.2: U1.P62 37.98,40.48 38,40.5 v37.5,41 | U1.P120 37.48,58.02 38,57.5 v38,56.5
  Bottom 0.6: v38,56.5 37.5,56 37.5,47 38,46.5 | 38,46.5 39.5,46.5 39.6,46.6 REG2.5.2 | v37.5,41 37.5,46 38,46.5
VCCINT  (via drill 0.6)  (1 unrouted)
  Top 0.2: U1.P49 31.48,39.48 31.5,40 31.88,40.5 v31.88,41 | U1.P61 37.48,39.98 37.5,40 37,40 36,41 v35.5,41 | U1.P133 30.98,58.77 32,57.75 33.25,57.75 33.5,57.5 v33.5,56.5 | U1.P121 36.98,57.98 36.5,57.5 v36.5,56.5
  Bottom 0.2: 35.5,51.6 REG1.2.4 35.1,52.4 35,52.5
  Bottom 0.6: v35.5,41 35.5,43 | 35.5,43 35.5,51.6 | v31.88,41 33.38,42.62 33.75,43 35.5,43 | v36.5,56.5 36.5,55.4 36.4,55.4 35.5,54.5 35.5,53.5 34.5,52.5 35,52 | v33.5,56.5 33.5,52.5 34,52 REG1.2.4